# EAGLE board Board (EAGLE 8.1.0)
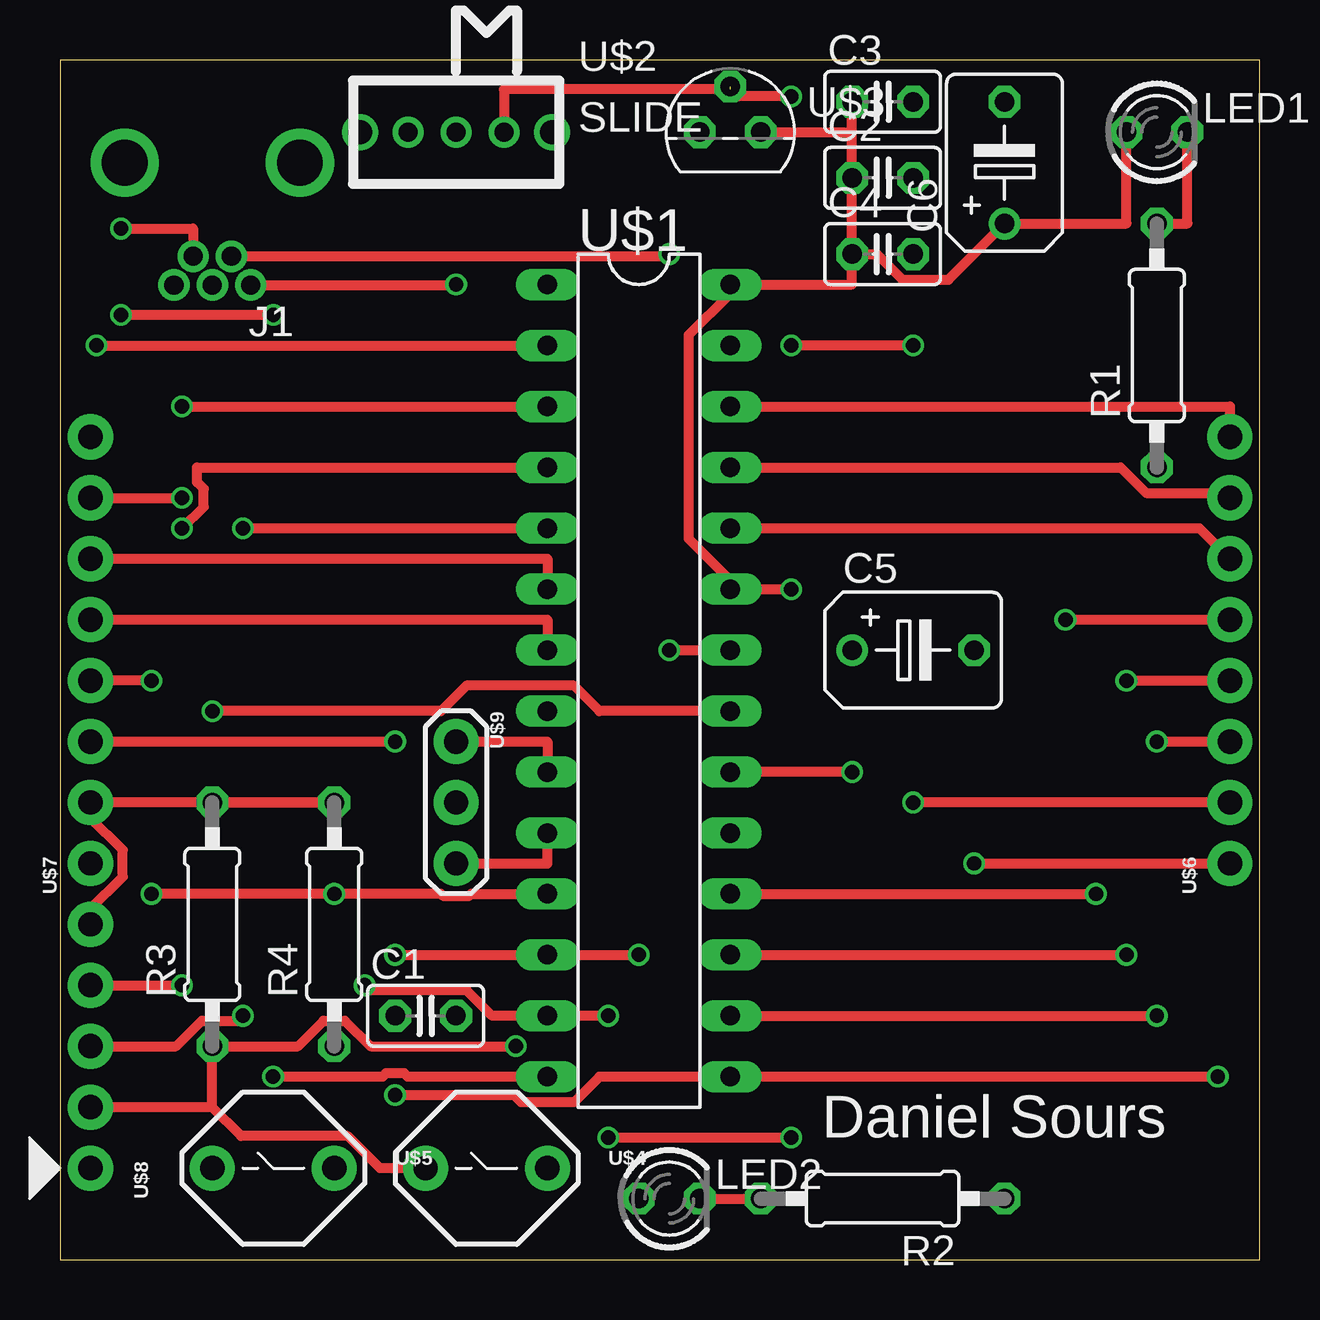
[diagram p0: board, top side]
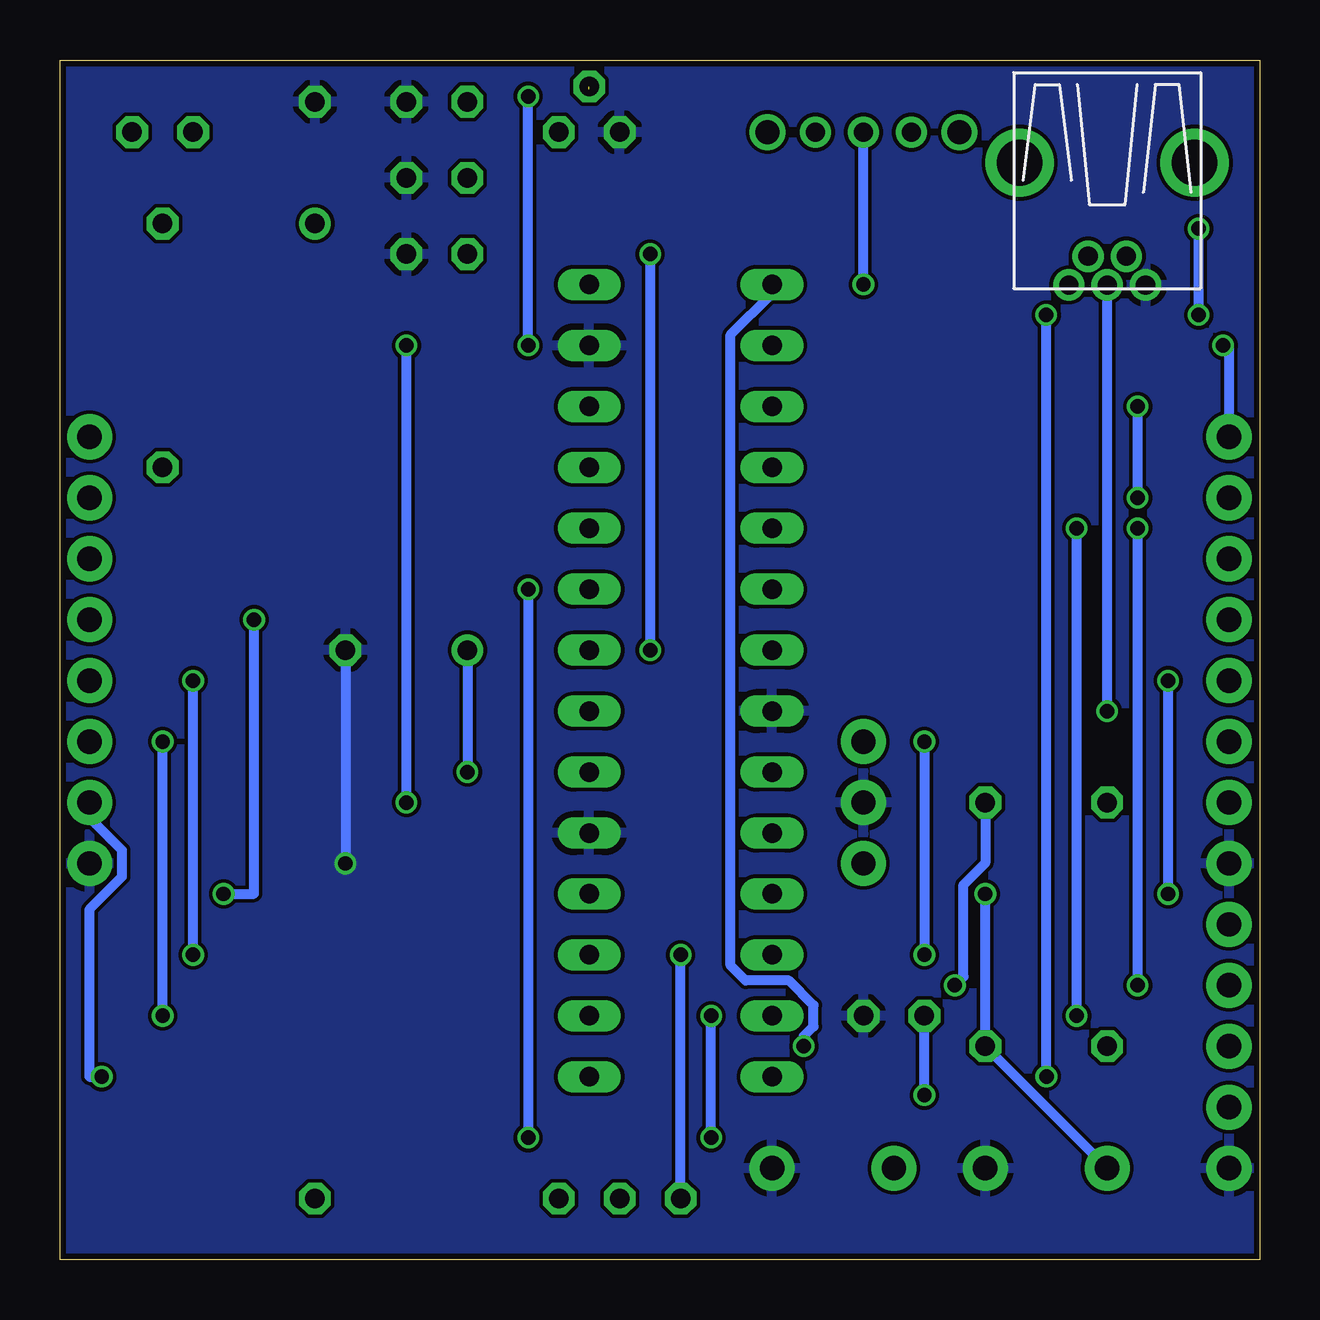
[diagram p1: board, bottom side, seen from below]

Size 50 x 50 mm. Coordinates in mm from the lower left corner, seen from the top.
Outline: 0,0 50,0 50,50 0,50 0,0
Copper layers (1*16): Top 0.035mm / dielectric 1.5mm / Bottom 0.035mm
Design rules "SeeedStudio_2layer_DRU_no_angle_20140221": minimum track width 6mil, minimum drill 12mil, track to track 6mil, track to pad 6mil, pad to pad 6mil, via to via 6mil, smd to smd 0mil, copper to edge 10mil, drill to drill 10mil, minimum pad ring 10mil, minimum via ring 6mil, stop-mask expansion 2mil, vias tented up to drill 100mil, thermal gap 10mil

## Footprints (pad centres in the part's own frame; a part is rotated, then mirrored left to right if it is on the bottom)
C025-025X050 = drill 0.813 octagon: 1 -1.27,0; 2 1.27,0
B45181B = drill 0.813: + -2.54,0 | drill 0.813 octagon: - 2.54,0
USB-MB-H = drill 0.8: D+ 5.1,0; D- 3.9,0.8; GND 5.1,-1.6; ID 3.9,-0.8; VBUS 5.1,1.6 | drill 1.9: P$6 0,-3.65; P$7 0,3.65
LED3MM = drill 0.813 octagon: A -1.27,0; K 1.27,0
0207/10 = drill 0.813 octagon: 1 -5.08,0; 2 5.08,0
DIL28-3 = drill 0.813 long: 1 -16.51,-3.81; 2 -13.97,-3.81; 3 -11.43,-3.81; 4 -8.89,-3.81; 5 -6.35,-3.81; 6 -3.81,-3.81; 7 -1.27,-3.81; 8 1.27,-3.81; 9 3.81,-3.81; 10 6.35,-3.81; 11 8.89,-3.81; 12 11.43,-3.81; 13 13.97,-3.81; 14 16.51,-3.81; 15 16.51,3.81; 16 13.97,3.81; 17 11.43,3.81; 18 8.89,3.81; 19 6.35,3.81; 20 3.81,3.81; 21 1.27,3.81; 22 -1.27,3.81; 23 -3.81,3.81; 24 -6.35,3.81; 25 -8.89,3.81; 26 -11.43,3.81; 27 -13.97,3.81; 28 -16.51,3.81
SLIDE = drill 0.8: 1 -2,0; 2 0,0; 3 2,0 | drill 1: P$1 -4,0; P$5 4,0
TO92 = drill 0.813 octagon: 1 -1.27,0; 2 0,1.905; 3 1.27,0
PB = drill 1.016 pad 1.88: 1 -3.81,1.27; 2 1.27,1.27
1X08 = drill 1.016 pad 1.88: 1 0,0; 2 2.54,0; 3 5.08,0; 4 7.62,0; 5 10.16,0; 6 12.7,0; 7 15.24,0; 8 17.78,0
1X05 = drill 1.016 pad 1.88: 1 0,0; 2 2.54,0; 3 5.08,0; 4 7.62,0; 5 10.16,0
OSC = drill 1.016 pad 1.88: 1 -2.54,0; 2 0,0; 3 2.54,0

## Placement (x,y rotation side)
C1  0.1uF  [C025-025X050]  15.24,10.16 0 top
C2  0.1uF  [C025-025X050]  34.29,45.09 0 top
C3  0.1uF  [C025-025X050]  34.29,48.26 0 top
C4  0.1uF  [C025-025X050]  34.29,41.91 0 top
C5  10uF  [B45181B]  35.56,25.4 0 top
C6  10uF  [B45181B]  39.37,45.72 90 top
J1  USB-MB-H  [USB-MB-H]  6.35,45.72 270 top
LED1  Red  [LED3MM]  45.72,46.99 0 top
LED2  Green  [LED3MM]  25.4,2.54 0 top
R1  330  [0207/10]  45.72,38.1 90 top
R2  330  [0207/10]  34.29,2.54 180 top
R3  10k  [0207/10]  6.35,13.97 90 top
R4  10k  [0207/10]  11.43,13.97 90 top
U$1  PIC32MX250F128B  [DIL28-3]  24.13,24.13 270 top
U$2  SLIDE  [SLIDE]  16.51,46.99 0 top
U$3  MCP1702  [TO92]  27.94,46.99 0 top
U$4  Reset  [PB]  19.05,2.54 0 top
U$5  User  [PB]  10.16,2.54 0 top
U$6  CONN_08  [1X08]  48.77,16.51 90 top
U$7  CONN_08  [1X08]  1.27,16.51 90 top
U$8  PICKIT3  [1X05]  1.27,3.81 90 top
U$9  8 MHz  [OSC]  16.51,19.05 270 top

## Library data of the parts
C1-C6 J1 R1-R4 U$1-U$9 = ME433_LIB
LED1 LED2 = led

## Nets
+3V3: C2.1 C3.1 C4.1 C6.+ LED1.A R3.2 R4.2 U$1.13 U$1.23 U$1.28 U$3.3 U$7.2 U$8.5
+5V: C1.1 U$1.15 U$2.3 U$3.2 U$6.2
A0: U$1.2 U$7.8
A1: U$1.3 U$7.7
A4/LED: LED2.A U$1.12 U$7.3
B2: U$1.6 U$7.6
B3: U$1.7 U$7.5
B4/USER: R4.1 U$1.11 U$5.1 U$7.4
B7: U$1.16 U$6.3
B8: U$1.17 U$6.4
B9: U$1.18 U$6.5
B13: U$1.24 U$6.6
B14: U$1.25 U$6.7
B15: U$1.26 U$6.8
D+: J1.D+ U$1.21
D-: J1.D- U$1.22
GND: C1.2 C2.2 C3.2 C4.2 C5.- C6.- J1.GND U$1.8 U$1.19 U$1.27 U$3.1 U$4.2 U$5.2 U$6.1 U$7.1 U$8.1 U$9.2
MCLR: R3.1 U$1.1 U$4.1 U$8.2
N$1: J1.VBUS U$2.2
N$2: U$1.9 U$9.1
N$3: U$1.10 U$9.3
N$4: LED1.K R1.2
N$5: LED2.K R2.2
N$7: C5.+ U$1.20
PGC: U$1.5 U$8.3
PGD: U$1.4 U$8.4
USBID: J1.ID U$1.14

## Tracks (layer width: path | path; a pad name or v marks a point on that pad's centre or on a via)
+3V3  (via drill 0.6)
  Top 0.406: C4.1 33.02,40.64 U$1.28 27.94,40.27 26.21,38.54 26.21,30.04 27.94,28.31 U$1.23 v30.48,27.94 | U$3.3 33.02,46.99 C3.1 C2.1 C4.1 | C4.1 34.05,41.91 35.12,40.84 37.03,40.84 C6.+ 44.45,43.18 LED1.A | U$8.5 1.27,14.61 2.62,15.95 2.62,17.07 1.27,18.41 U$7.2 R4.2 R3.2 | v12.7,11.43 12.9,11.23 16.95,11.23 18.02,10.16 U$1.13 v22.86,10.16 | v30.48,5.08 v22.86,5.08
  Bottom 0.406: R4.2 11.43,16.53 12.34,15.62 12.34,11.79 v12.7,11.43 | v30.48,27.94 v30.48,5.08 | v22.86,5.08 v22.86,10.16
+5V  (via drill 0.6)  (1 unrouted)
  Top 0.406: v48.26,7.62 U$1.15 22.49,7.62 21.42,6.55 19.22,6.55 18.92,6.85 v13.97,6.85 13.97,6.99 | U$6.2 v35.56,19.05 | v35.56,38.1 v30.48,38.1 | v30.48,48.48 28.24,48.48 27.94,48.78 18.51,48.78 U$2.3
  Bottom 0.406: U$6.2 48.77,18.41 47.42,17.07 47.42,15.95 48.78,14.59 48.78,7.62 v48.26,7.62 | v35.56,19.05 v35.56,38.1 | v30.48,38.1 v30.48,48.48 | v13.97,6.85 C1.1
A0  (via drill 0.6)
  Top 0.406: v1.52,38.1 U$1.2
  Bottom 0.406: U$7.8 1.27,38.1 v1.52,38.1
A1  (via drill 0.6)
  Top 0.406: U$7.7 v5.08,31.75 | v5.08,35.56 U$1.3
  Bottom 0.406: v5.08,31.75 v5.08,35.56
A4/LED  (via drill 0.6)
  Top 0.406: v24.13,12.7 U$1.12 v13.97,12.7 | U$7.3 v13.97,21.59
  Bottom 0.406: LED2.A v24.13,12.7 | v13.97,21.59 v13.97,12.7
B2
  Top 0.406: U$7.6 20.32,29.21 U$1.6
B3
  Top 0.406: U$7.5 20.32,26.67 U$1.7
B4/USER  (via drill 0.6)
  Top 0.406: U$1.11 17.14,15.24 17.07,15.16 15.95,15.16 15.88,15.24 v11.43,15.24 v3.81,15.24 | v3.81,24.13 U$7.4
  Bottom 0.406: U$5.1 R4.1 v11.43,15.24 | v3.81,15.24 v3.81,24.13
B7  (via drill 0.6)
  Top 0.406: U$1.16 v45.72,10.16 | v45.72,21.59 U$6.3
  Bottom 0.406: v45.72,10.16 v45.72,21.59
B8  (via drill 0.6)
  Top 0.406: U$1.17 v44.45,12.7 | v44.45,24.13 U$6.4
  Bottom 0.406: v44.45,12.7 v44.45,24.13
B9  (via drill 0.6)
  Top 0.406: U$1.18 v43.18,15.24 | v41.91,26.67 U$6.5
  Bottom 0.406: v43.18,15.24 41.91,15.24 v41.91,26.67
B13
  Top 0.406: U$1.24 47.5,30.48 U$6.6
B14
  Top 0.406: U$1.25 44.21,33.02 45.28,31.95 48.56,31.95 U$6.7
B15
  Top 0.406: U$1.26 48.77,35.56 U$6.8
D+  (via drill 0.6)
  Top 0.406: v6.35,22.86 15.88,22.86 16.94,23.93 21.42,23.93 22.49,22.86 U$1.21
  Bottom 0.406: v6.35,22.86 J1.D+
D-  (via drill 0.6)
  Top 0.406: J1.D- 25.4,41.82 v25.4,41.91 | v25.4,25.4 U$1.22
  Bottom 0.406: v25.4,41.91 v25.4,25.4
GND  (via drill 0.6)
  Top 0.406: v38.1,16.51 U$6.1
  Bottom 0.406: C5.- v38.1,16.51
  pour Bottom: 0,50.16 50.16,50.16 50.16,0 0,0
MCLR  (via drill 0.6)
  Top 0.406: 6.35,6.35 U$8.2 | 6.35,6.35 R3.1 9.92,8.89 10.99,9.96 11.87,9.96 12.94,8.89 v19,8.89 | U$4.1 13.33,3.81 11.99,5.16 7.54,5.16 6.35,6.35
  Bottom 0.406: U$1.1 20.32,40.27 22.05,38.54 22.05,12.26 21.42,11.63 19.62,11.63 18.59,10.6 18.59,9.72 19,9.31 v19,8.89
N$1  (via drill 0.6)
  Top 0.406: J1.VBUS 16.51,40.62 v16.51,40.64
  Bottom 0.406: v16.51,40.64 U$2.2
N$2
  Top 0.406: U$9.1 20.32,21.59 U$1.9
N$3
  Top 0.406: U$9.3 20.32,16.51 U$1.10
N$4
  Top 0.406: R1.2 46.99,43.18 LED1.K
N$5
  Top 0.406: LED2.K R2.2
N$7  (via drill 0.6)
  Top 0.406: v33.02,20.32 U$1.20
  Bottom 0.406: C5.+ v33.02,20.32
PGC  (via drill 0.6)
  Top 0.406: U$8.3 4.84,8.89 5.91,9.96 7.42,9.96 v7.62,10.16 | v7.62,30.48 U$1.5
  Bottom 0.406: v7.62,10.16 v7.62,30.48
PGD  (via drill 0.6)
  Top 0.406: U$8.4 v5.08,11.43 | v5.08,30.48 5.1,30.48 5.99,31.37 5.99,32.13 5.71,32.4 5.71,33.02 U$1.4
  Bottom 0.406: v5.08,11.43 v5.08,30.48
USBID  (via drill 0.6)
  Top 0.406: U$1.14 14.49,7.62 14.35,7.76 13.59,7.76 13.45,7.62 v8.88,7.62 v8.88,7.63 | v8.89,39.37 v2.54,39.37 | v2.54,42.97 5.55,42.97 J1.ID
  Bottom 0.406: v8.88,7.63 v8.89,7.63 v8.89,39.37 | v2.54,39.37 v2.54,42.97

## Text on the board
tPlace: Daniel Sours